# EAGLE board Brain (EAGLE 6.1)

Size 100 x 80 mm. Coordinates in mm from the lower left corner, seen from the top.
Outline: 0,0 100,0 100,80 0,80 0,0
Outline: 12.06,38.1 arc180 64.14,38.1 arc180 12.06,38.1
Copper layers (1*16): Top 0.035mm / dielectric 1.5mm / Bottom 0.035mm
Design rules: minimum track width 10mil, minimum drill 24mil, track to track 8mil, track to pad 8mil, pad to pad 8mil, via to via 8mil, smd to smd 8mil, copper to edge 40mil, drill to drill 8mil, minimum pad ring 10mil, minimum via ring 8mil, stop-mask expansion 4mil, vias tented up to drill 0mil, thermal gap 10mil

## Footprints (pad centres in the part's own frame; a part is rotated, then mirrored left to right if it is on the bottom)
3X2F_1MM_SMD = smd 1.702 x 0.61: P1 -1.689,1; P2 -1.689,0; P3 -1.689,-1; P4 1.689,-1; P5 1.689,0; P6 1.689,1
2X2F_1MM_SMD = smd 1.702 x 0.61: P1 -1.689,0.5; P2 -1.689,-0.5; P3 1.689,-0.5; P4 1.689,0.5

## Placement (x,y rotation side)
H1  3X2F_1MM_SMD  [3X2F_1MM_SMD]  38.1,46.35 0 top
H2  3X2F_1MM_SMD  [3X2F_1MM_SMD]  45.25,42.23 300 top
H3  3X2F_1MM_SMD  [3X2F_1MM_SMD]  45.25,33.97 240 top
H4  3X2F_1MM_SMD  [3X2F_1MM_SMD]  38.1,29.84 180 top
H5  3X2F_1MM_SMD  [3X2F_1MM_SMD]  30.95,33.97 120 top
H6  3X2F_1MM_SMD  [3X2F_1MM_SMD]  30.95,42.23 60 top
H7  2X2F_1MM_SMD  [2X2F_1MM_SMD]  38.1,61.91 180 top
H8  2X2F_1MM_SMD  [2X2F_1MM_SMD]  58.72,26.19 60 top
H9  2X2F_1MM_SMD  [2X2F_1MM_SMD]  17.48,26.19 300 top

## Library data of the parts
H1-H9 = Customs